# Altium PCB ConnectorBoard.PcbDoc (part 1 of 2)
Units mm, origin at the board's own origin, x right, y up, seen from the top; angles counter-clockwise.
Board outline 139.19 x 208 mm, 4 copper layers (Top Layer, GND, Mid-Layer 1, Bottom Layer); 72 components, 192 nets, 1111 pads, 260 vias.
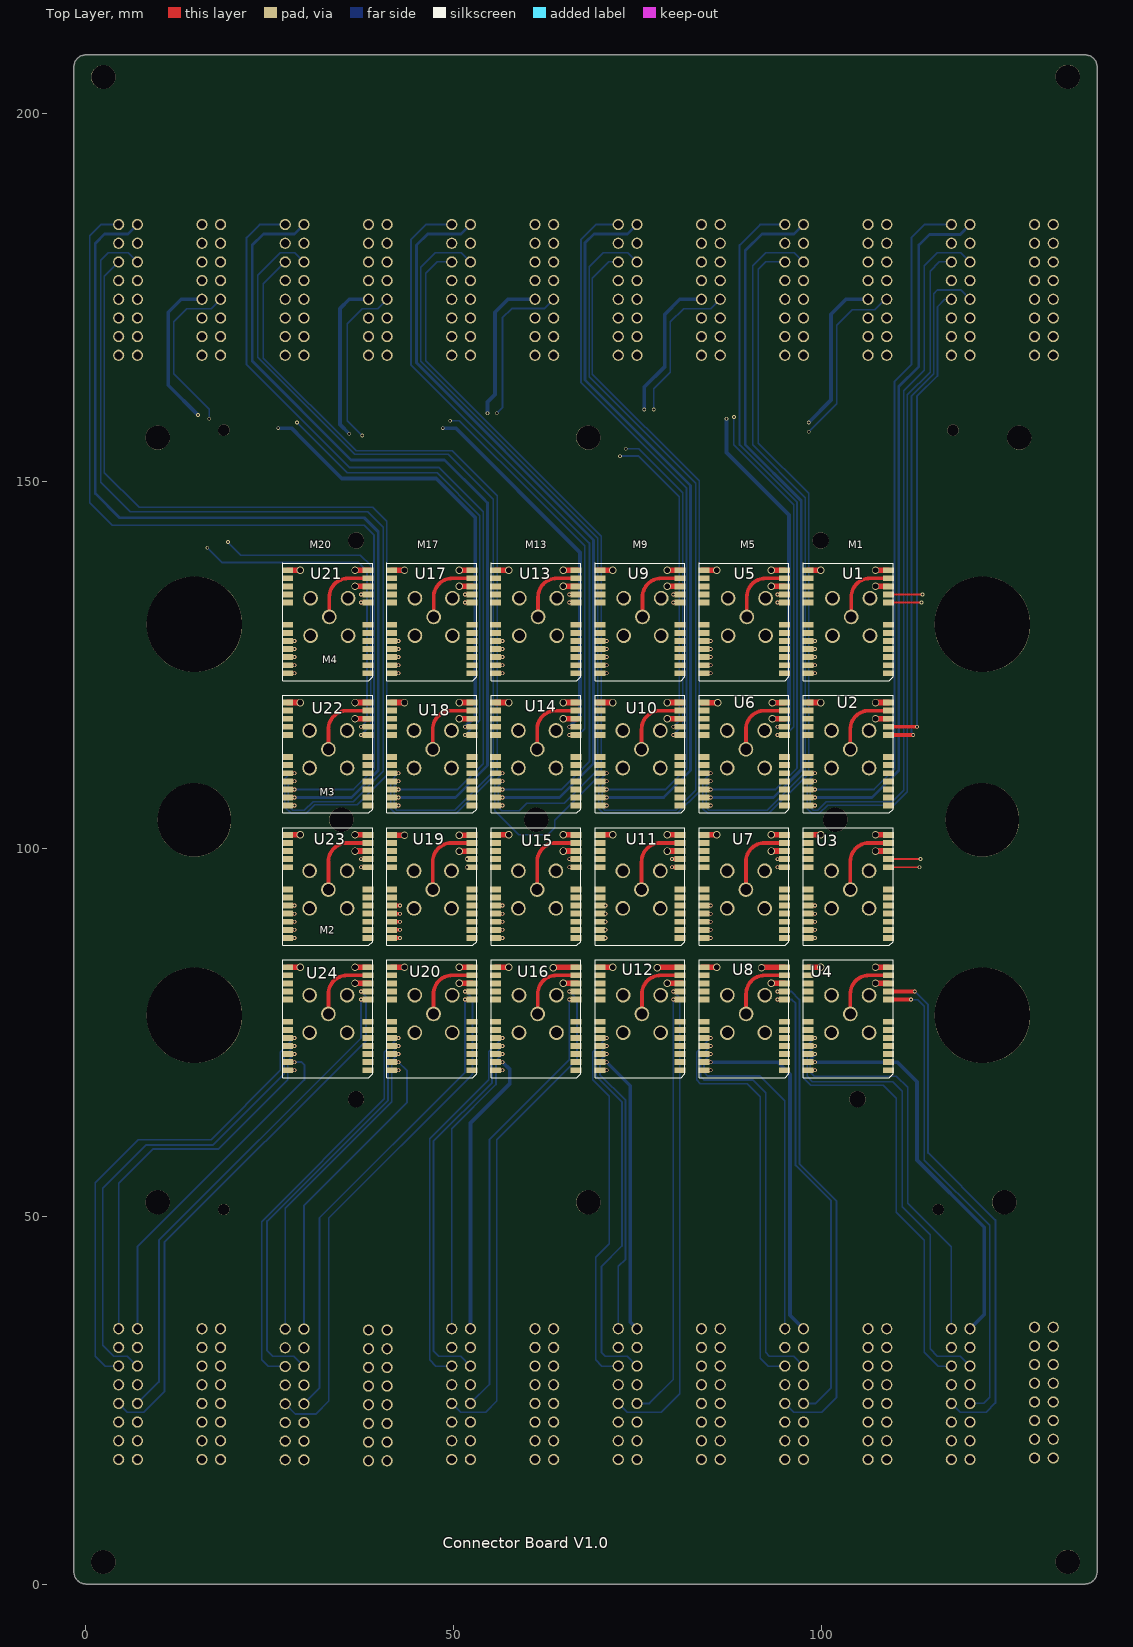
[diagram p0: Top Layer view]
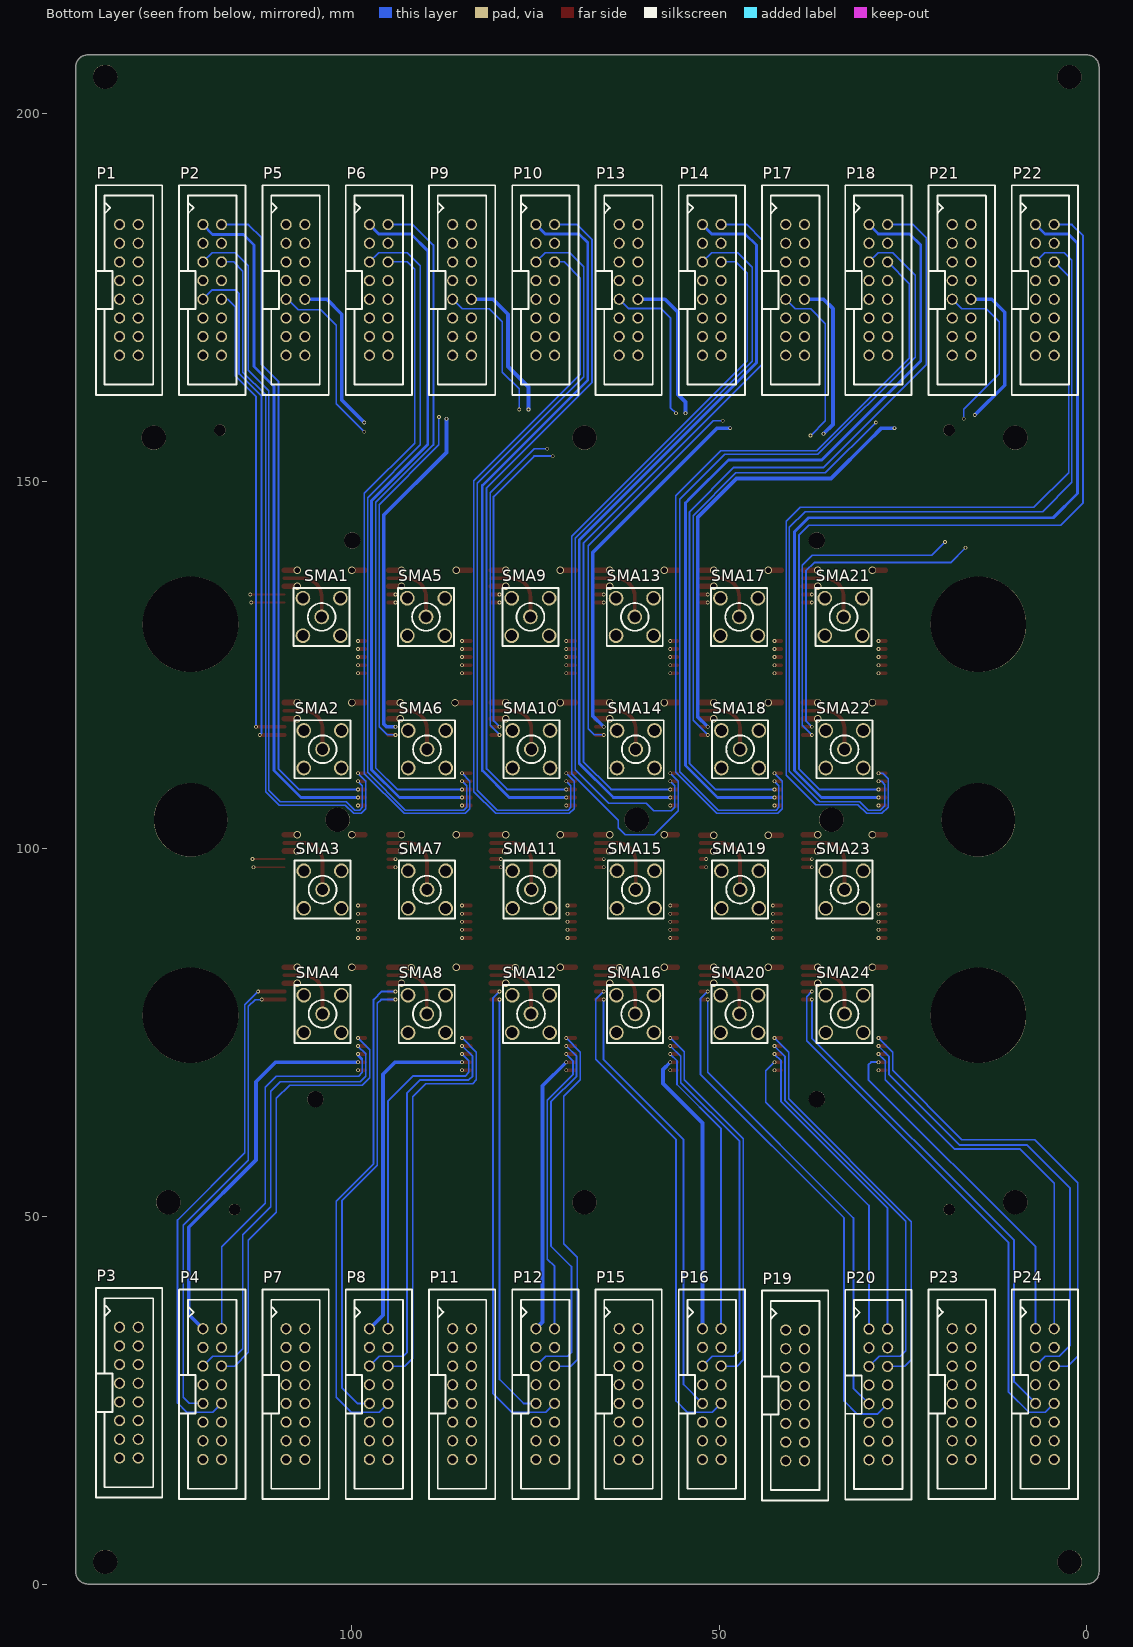
[diagram p1: Bottom Layer view, seen from below]
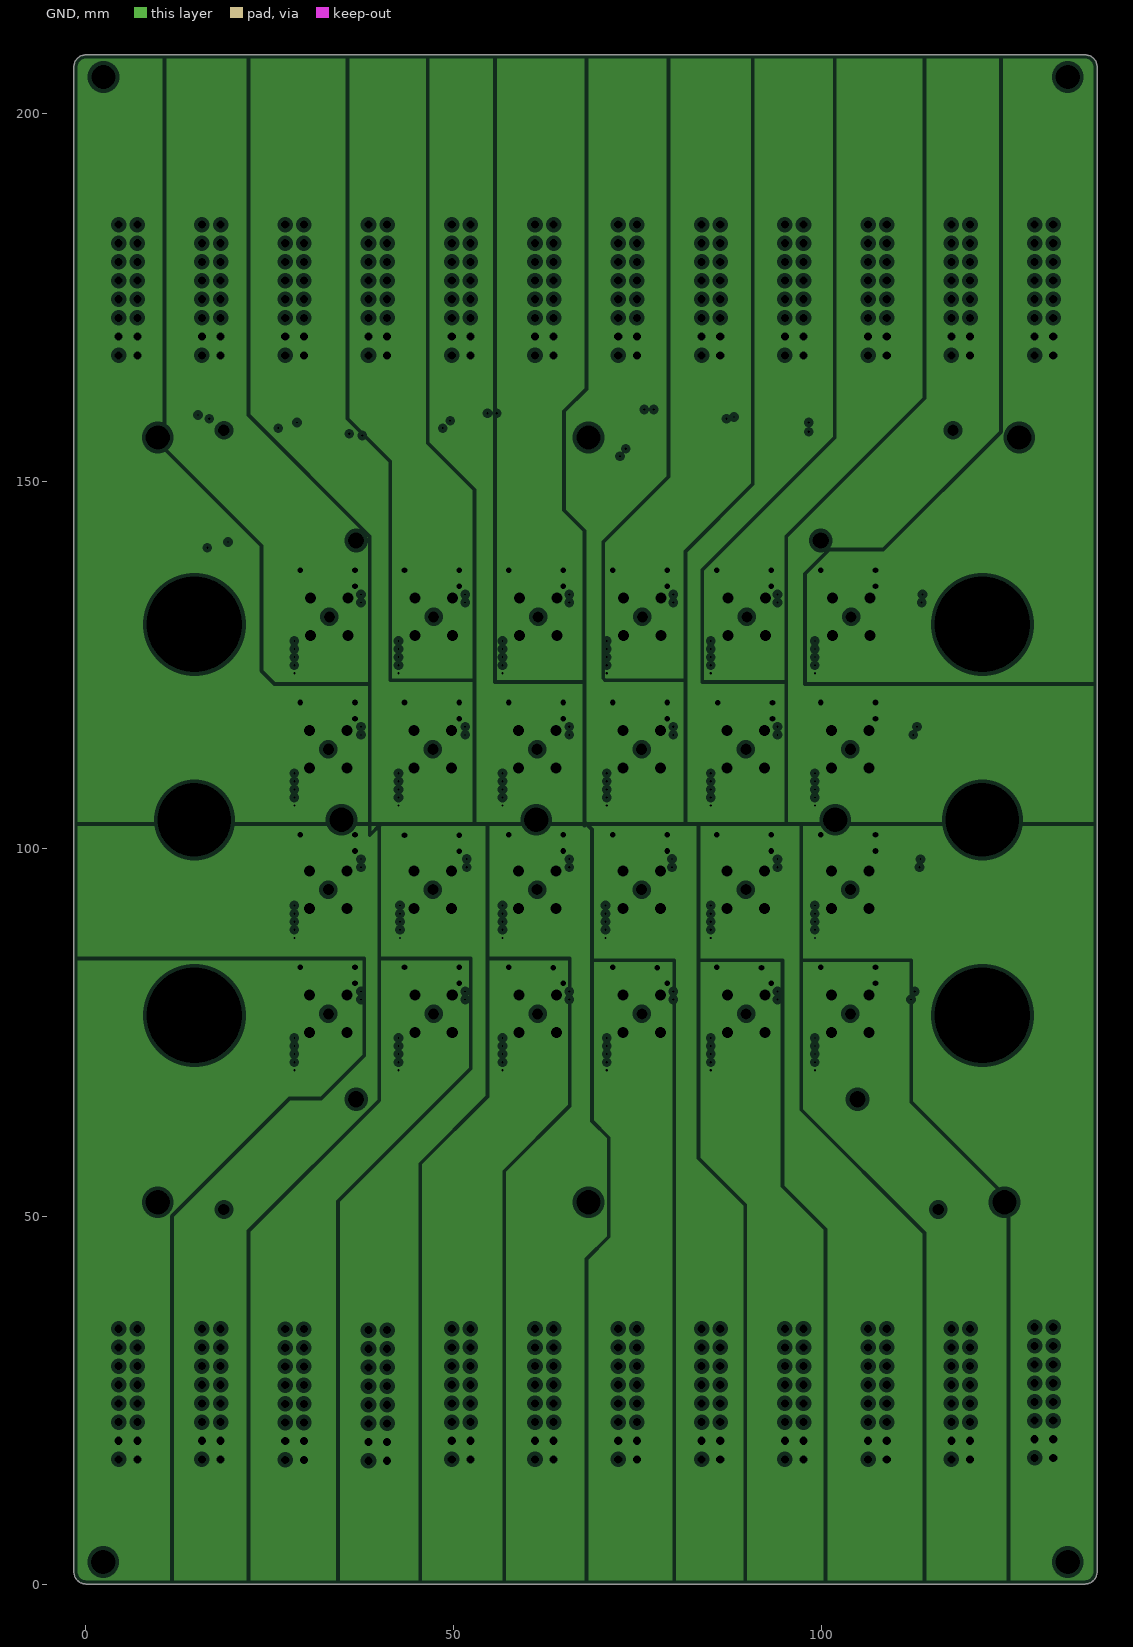
[diagram p2: GND, clearances drawn from the general rule]
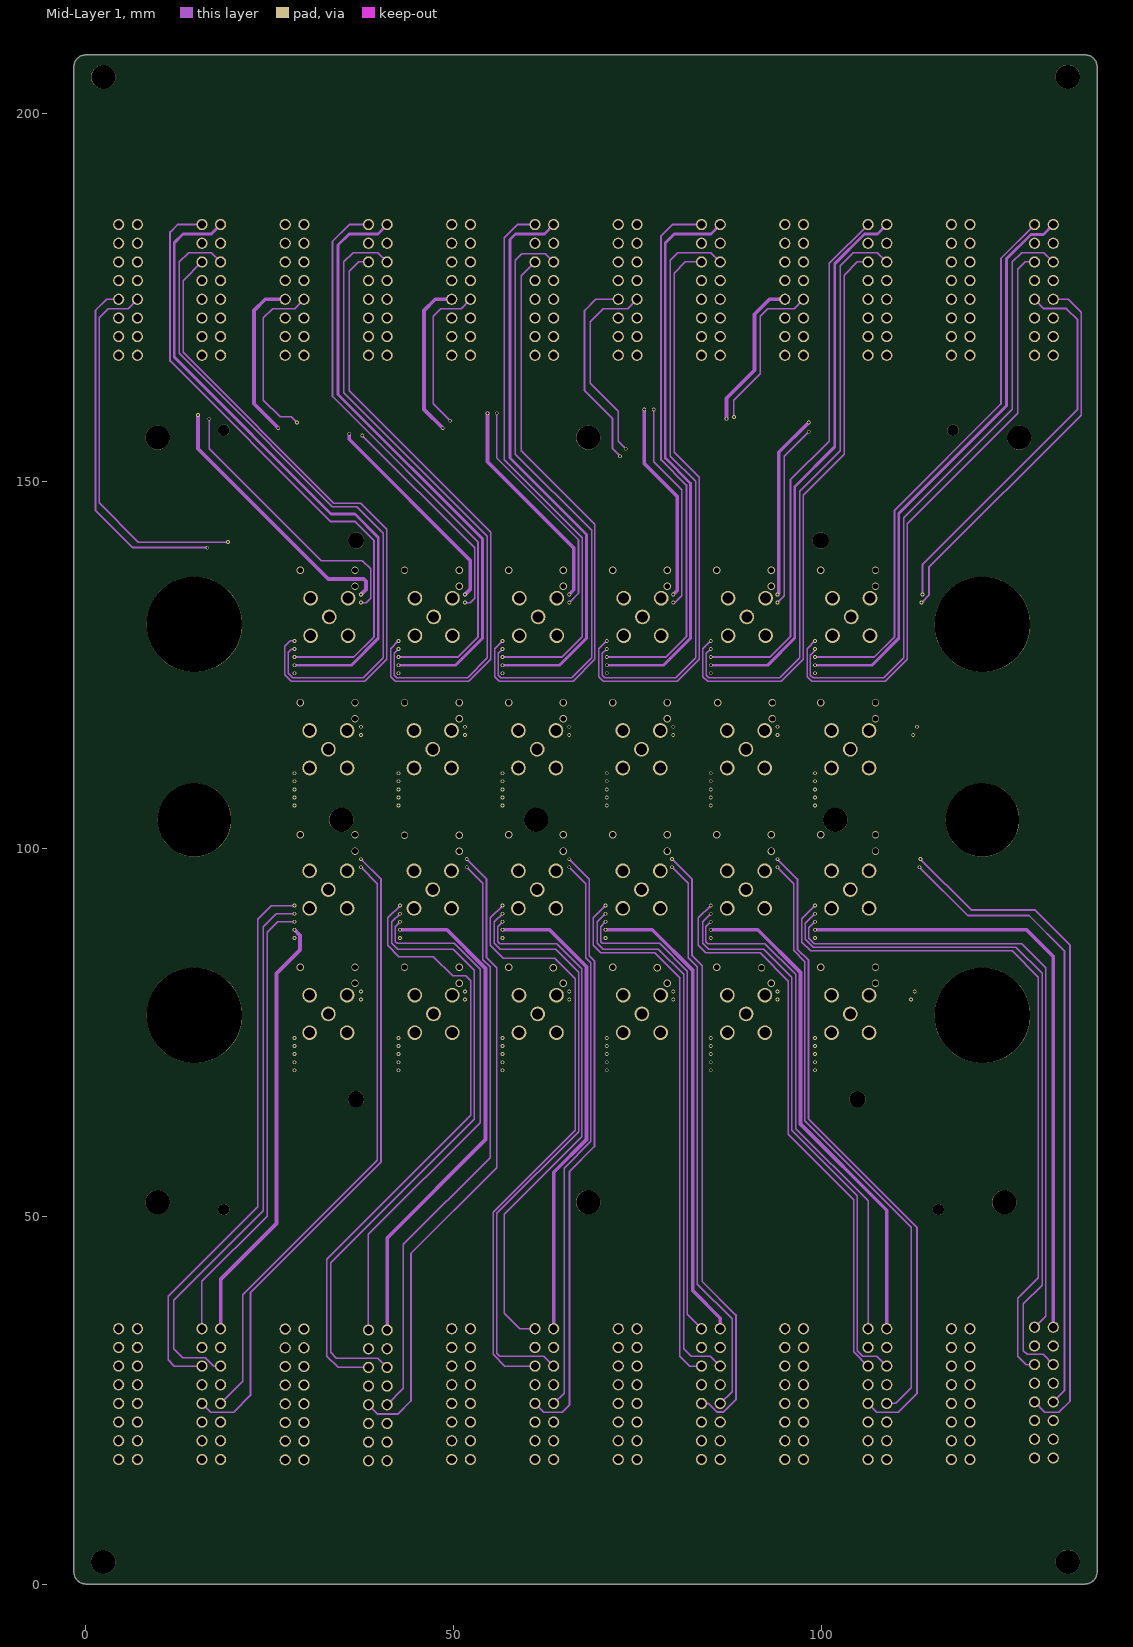
[diagram p3: Mid-Layer 1]

## Layer stack, top to bottom
Top Solder: solder mask 0.0102, Solder Resist, Dk 3.5
Top Layer: signal copper 0.0356
Dielectric1: core 0.32, FR-4, Dk 4.8
GND: plane copper 0.0356
Dielectric3: prepreg 0.32, FR-4, Dk 4.8
Mid-Layer 1: signal copper 0.0356
Dielectric2: core 0.32, FR-4, Dk 4.8
Bottom Layer: signal copper 0.0356
Bottom Solder: solder mask 0.0102, Solder Resist, Dk 3.5

## Board outline
-1.65,1.65 ccw(c0,1.65) 0,0 135.886,0 ccw(c135.886,1.65) 137.536,1.65 137.536,206.35 ccw(c135.886,206.35) 135.886,208 0,208 ccw(c0,206.35) -1.65,206.35

## Design rules (kind name [scope] priority, off if disabled: settings)
Clearance rf [InNetClass('RF')] p1: gap=0.051 ignorepadtopadclearanceinfootprint=FALSE except(0: Arc-Hole Track-Hole SMDPad-Hole THPad-Hole Via-Hole Fill-Hole Poly-Hole Region-Hole Text-Hole)
Clearance [All] p2: gap=0.254 ignorepadtopadclearanceinfootprint=FALSE except(0: Arc-Hole Track-Hole SMDPad-Hole THPad-Hole Via-Hole Fill-Hole Poly-Hole Region-Hole Text-Hole)
MinimumSolderMaskSliver [All] p1: minsoldermaskwidth=0.051
PlaneClearance [All] p1: clearance=0.508
PlaneConnect [All] p1: planeconnectstyle=Relief reliefexpansion=0.508 reliefentries=4 reliefconductorwidth=0.254 reliefairgap=0.254
PolygonConnect [All] p1: connectstyle=Relief reliefconductorwidth=0.254 reliefentries=4 polygonreliefangle="90 Angle" airgapwidth=0.254
RoutingVias [All] p1: holewidth=0.711 width=1.27 viastyle="Through Hole" minholewidth=0.711 minwidth=1.27 maxholewidth=0.711 maxwidth=1.27
SilkToSilkClearance [All] p1: silktosilkclearance=0.127
SilkToSolderMaskClearance SilkscreenOverComponentPads [IsPad] p1: minsilkscreentomaskgap=0 clearancetoexposedcopper=TRUE
SolderMaskExpansion [All] p1: expansion=0.102 istentingtop=FALSE
Width power [InNetClass('POWER')] p1: maxlimit=2.54 minlimit=0.254 preferedwidth=0.381
Width [All] p2: maxlimit=2.54 minlimit=0.203 preferedwidth=0.203
25 further rules are at their usual default settings.

## Components (designator, comment, footprint, x,y, rotation, side; value= is the part's Value field where it differs from the comment)
P1 "KH-2.54PH180-2X8P-L8.9" IDC-TH_16P-P2.54_C3406 130.302,176.022 r270 bottom locked
P2 "KH-2.54PH180-2X8P-L8.9" IDC-TH_16P-P2.54_C3406 118.976,176.022 r270 bottom locked
P3 "KH-2.54PH180-2X8P-L8.9" IDC-TH_16P-P2.54_C3406 130.302,26.035 r270 bottom locked
P4 "KH-2.54PH180-2X8P-L8.9" IDC-TH_16P-P2.54_C3406 118.976,25.832 r270 bottom locked
P5 "KH-2.54PH180-2X8P-L8.9" IDC-TH_16P-P2.54_C3406 107.65,176.022 r270 bottom locked
P6 "KH-2.54PH180-2X8P-L8.9" IDC-TH_16P-P2.54_C3406 96.324,176.022 r270 bottom locked
P7 "KH-2.54PH180-2X8P-L8.9" IDC-TH_16P-P2.54_C3406 107.65,25.832 r270 bottom locked
P8 "KH-2.54PH180-2X8P-L8.9" IDC-TH_16P-P2.54_C3406 96.324,25.832 r270 bottom locked
P9 "KH-2.54PH180-2X8P-L8.9" IDC-TH_16P-P2.54_C3406 84.998,176.022 r270 bottom locked
P10 "KH-2.54PH180-2X8P-L8.9" IDC-TH_16P-P2.54_C3406 73.672,176.022 r270 bottom locked
P11 "KH-2.54PH180-2X8P-L8.9" IDC-TH_16P-P2.54_C3406 84.998,25.832 r270 bottom locked
P12 "KH-2.54PH180-2X8P-L8.9" IDC-TH_16P-P2.54_C3406 73.672,25.832 r270 bottom locked
P13 "KH-2.54PH180-2X8P-L8.9" IDC-TH_16P-P2.54_C3406 62.346,176.022 r270 bottom locked
P14 "KH-2.54PH180-2X8P-L8.9" IDC-TH_16P-P2.54_C3406 51.02,176.022 r270 bottom locked
P15 "KH-2.54PH180-2X8P-L8.9" IDC-TH_16P-P2.54_C3406 62.346,25.832 r270 bottom locked
P16 "KH-2.54PH180-2X8P-L8.9" IDC-TH_16P-P2.54_C3406 51.02,25.832 r270 bottom locked
P17 "KH-2.54PH180-2X8P-L8.9" IDC-TH_16P-P2.54_C3406 39.694,176.022 r270 bottom locked
P18 "KH-2.54PH180-2X8P-L8.9" IDC-TH_16P-P2.54_C3406 28.368,176.022 r270 bottom locked
P19 "KH-2.54PH180-2X8P-L8.9" IDC-TH_16P-P2.54_C3406 39.694,25.654 r270 bottom locked
P20 "KH-2.54PH180-2X8P-L8.9" IDC-TH_16P-P2.54_C3406 28.368,25.781 r270 bottom locked
P21 "KH-2.54PH180-2X8P-L8.9" IDC-TH_16P-P2.54_C3406 17.042,176.022 r270 bottom locked
P22 "KH-2.54PH180-2X8P-L8.9" IDC-TH_16P-P2.54_C3406 5.716,176.022 r270 bottom locked
P23 "KH-2.54PH180-2X8P-L8.9" IDC-TH_16P-P2.54_C3406 17.042,25.832 r270 bottom locked
P24 "KH-2.54PH180-2X8P-L8.9" IDC-TH_16P-P2.54_C3406 5.716,25.832 r270 bottom locked
SMA1 "*" SMA-TH_HL-SMA-KHD4 104.09,131.547 r270 bottom locked
SMA2 "*" SMA-TH_HL-SMA-KHD4 103.963,113.546 r270 bottom locked
SMA3 "*" SMA-TH_HL-SMA-KHD4 103.963,94.454 r90 bottom locked
SMA4 "*" SMA-TH_HL-SMA-KHD4 103.963,77.546 r90 bottom locked
SMA5 "*" SMA-TH_HL-SMA-KHD4 89.892,131.547 r270 bottom locked
SMA6 "*" SMA-TH_HL-SMA-KHD4 89.765,113.546 r270 bottom locked
SMA7 "*" SMA-TH_HL-SMA-KHD4 89.765,94.454 r90 bottom locked
SMA8 "*" SMA-TH_HL-SMA-KHD4 89.79,77.546 r90 bottom locked
SMA9 "*" SMA-TH_HL-SMA-KHD4 75.693,131.547 r270 bottom locked
SMA10 "*" SMA-TH_HL-SMA-KHD4 75.566,113.546 r270 bottom locked
SMA11 "*" SMA-TH_HL-SMA-KHD4 75.566,94.454 r90 bottom locked
SMA12 "*" SMA-TH_HL-SMA-KHD4 75.617,77.546 r90 bottom locked
SMA13 "*" SMA-TH_HL-SMA-KHD4 61.494,131.547 r270 bottom locked
SMA14 "*" SMA-TH_HL-SMA-KHD4 61.367,113.546 r270 bottom locked
SMA15 "*" SMA-TH_HL-SMA-KHD4 61.367,94.454 r90 bottom locked
SMA16 "*" SMA-TH_HL-SMA-KHD4 61.444,77.546 r90 bottom locked
SMA17 "*" SMA-TH_HL-SMA-KHD4 47.296,131.547 r270 bottom locked
SMA18 "*" SMA-TH_HL-SMA-KHD4 47.169,113.546 r270 bottom locked
SMA19 "*" SMA-TH_HL-SMA-KHD4 47.169,94.454 r90 bottom locked
SMA20 "*" SMA-TH_HL-SMA-KHD4 47.27,77.546 r90 bottom locked
SMA21 "*" SMA-TH_HL-SMA-KHD4 33.097,131.547 r270 bottom locked
SMA22 "*" SMA-TH_HL-SMA-KHD4 32.97,113.546 r270 bottom locked
SMA23 "*" SMA-TH_HL-SMA-KHD4 32.97,94.454 r90 bottom locked
SMA24 "*" SMA-TH_HL-SMA-KHD4 32.97,77.546 r90 bottom locked
U1 "LB1020B" LB1020B 109.773,138.882 r180 top locked
U2 "LB1020B" LB1020B 109.773,120.882 r180 top locked
U3 "LB1020B" LB1020B 109.773,102.882 r180 top locked
U4 "LB1020B" LB1020B 109.773,84.882 r180 top locked
U5 "LB1020B" LB1020B 95.613,138.882 r180 top locked
U6 "LB1020B" LB1020B 95.613,120.882 r180 top locked
U7 "LB1020B" LB1020B 95.613,102.882 r180 top locked
U8 "LB1020B" LB1020B 95.613,84.882 r180 top locked
U9 "LB1020B" LB1020B 81.453,138.882 r180 top locked
U10 "LB1020B" LB1020B 81.453,120.882 r180 top locked
U11 "LB1020B" LB1020B 81.453,102.882 r180 top locked
U12 "LB1020B" LB1020B 81.453,84.882 r180 top locked
U13 "LB1020B" LB1020B 67.293,138.882 r180 top locked
U14 "LB1020B" LB1020B 67.293,120.882 r180 top locked
U15 "LB1020B" LB1020B 67.293,102.882 r180 top locked
U16 "LB1020B" LB1020B 67.293,84.882 r180 top locked
U17 "LB1020B" LB1020B 53.133,138.882 r180 top locked
U18 "LB1020B" LB1020B 53.133,120.882 r180 top locked
U19 "LB1020B" LB1020B 53.133,102.882 r180 top locked
U20 "LB1020B" LB1020B 53.133,84.882 r180 top locked
U21 "LB1020B" LB1020B 38.973,138.882 r180 top locked
U22 "LB1020B" LB1020B 38.973,120.882 r180 top locked
U23 "LB1020B" LB1020B 38.973,102.882 r180 top locked
U24 "LB1020B" LB1020B 38.973,84.882 r180 top locked

## Footprints (in the part's own frame and the unit in brackets; to place one, negate y for a bottom-side part, rotate by r counter-clockwise, add the part's x,y. Pads: shape width x height; smd on the part's side, far side on the other; paste and mask are expansions set on the pad)
IDC-TH_16P-P2.54_C3406 [mil]
  round 60 hole 43.3 paste+2: 1(-350,-50) 2(-350,50) 3(-250,-50) 4(-250,50) 5(-150,-50) 6(-150,50) 7(-50,-50) 8(-50,50) 9(50,-50) 10(50,50) 11(150,-50) 12(150,50) 13(250,-50) 14(250,50) 15(350,-50) 16(350,50)
  silkscreen extent -561,-177 563,178
LB1020B [mm]
  rect 1.5x0.8 smd: 1(0.626,15.002) 2(0.626,13.902) 3(0.626,12.802) 4(0.626,11.702) 5(0.626,10.602) 6(0.626,9.502) 7(0.626,8.402) 8(0.626,5.382) 9(0.626,4.282) 10(0.626,3.182) 11(0.626,2.082) 12(0.626,0.982) 13(11.566,0.982) 14(11.566,2.082) 15(11.566,3.182) 16(11.566,4.282) 17(11.566,5.382) 18(11.566,8.402) 19(11.566,9.502) 20(11.566,10.602) 21(11.566,11.702) 22(11.566,12.802) 23(11.566,13.902) 24(11.566,15.002)
  silkscreen extent 0,0 12.2,16
SMA-TH_HL-SMA-KHD4 [mm]
  round 2 hole 1.5 paste+0.051: 1(-2.55,2.55) 2(2.55,2.55) 3(2.55,-2.55) 4(-2.55,-2.55) 5(0,0)
  silkscreen extent -3.94,-3.81 3.94,3.81

## Part data
P1 P2 P3 P4 P5 P6 P7 P8 P9 P10 P11 P12 P13 P14 P15 P16 P17 P18 P19 P20 P21 P22 P23 P24: library part HDR-IDC-2.54-2X8P
SMA1 SMA2 SMA3 SMA4 SMA5 SMA6 SMA7 SMA8 SMA9 SMA10 SMA11 SMA12 SMA13 SMA14 SMA15 SMA16 SMA17 SMA18 SMA19 SMA20 SMA21 SMA22 SMA23 SMA24: library part HL-SMA-KHD4

## Free pads (board coordinates)
  round 3.3 hole 3.3: 1(2.35,2.994) 1(2.367,204.988) 1(9.748,51.944) 1(9.748,155.944) 1(34.748,103.944) 1(61.238,103.944) 1(68.338,51.944) 1(68.338,155.944) 1(101.928,103.944) 1(124.928,51.944) 1(126.928,155.944) 1(133.536,3) 1(133.536,205)
  round 0.152 on Mech1: 1(10.957,16.172) 1(135.886,208) 1(137.536,206.35)
  round 13 hole 13: 1(14.748,77.353) 1(14.748,130.536) 1(121.928,130.536)
  round 10 hole 10: 1(14.748,103.944) 1(121.928,103.944)
  round 1.55 hole 1.55: 1(18.748,50.944) 1(18.748,156.944) 1(115.928,50.944) 1(117.928,156.944)
  round 2.2 hole 2.2: 1(36.738,65.944) 1(36.738,141.944) 1(99.938,141.944) 1(104.938,65.944)
  round 13.002 hole 13.002: 1(121.928,77.353)
  round 0.064 on Mech6: 1(131.596,50.948)

## Via types
v1: diameter 0.508, hole 0.305, Top Layer to Bottom Layer, tented both sides, 188 vias
v2: diameter 1.016, hole 0.762, Top Layer to Bottom Layer, tented both sides, 72 vias

## Nets (pads, with @x,y where several pads share a name; then routed paths per layer and width w, separated by ;. In a path a pad name is that pad's centre, name@x,y a point inside that pad or via, vN(x,y) a via of type N, cw(c..) or ccw(c..) an arc to the next point about the centre after c; other vN are vias at no path point)
"DCIN_3.3V _RF1": P1.1 U1.23 | length 79.8
  Top Layer w0.508: U1.23@98.207,124.98 v1(99.146,124.98)
  Mid-Layer 1 w0.381: v1(99.146,124.98) 106.896,124.98 110.553,128.637 110.553,145.606 125.222,160.274 125.222,180.268 128.532,183.578 130.238,183.578 P1.1@131.572,184.912
"DCIN_3.3V _RF2": P2.1 U2.23 | length 94.6
  Top Layer w0.508: U2.23@98.207,106.98 v1(99.146,106.98)
  Bottom Layer w0.381: v1(99.146,106.98) 106.896,106.98 110.553,110.637 110.553,162.877 113.284,165.608 113.284,182.118 114.744,183.578 118.912,183.578 P2.1@120.246,184.912
"DCIN_3.3V _RF3": P3.1 U3.23 | length 85.3
  Top Layer w0.508: U3.23@98.207,88.98 v1(99.146,88.98)
  Mid-Layer 1 w0.508: v1(99.146,88.98) 127.936,88.98 131.572,85.344 P3.1@131.572,34.925
"DCIN_3.3V _RF4": P4.1 U4.23 | length 54.1
  Top Layer w0.508: U4.23@98.207,70.98 v1(99.146,70.98)
  Bottom Layer w0.508: v1(99.146,70.98) 110.376,70.98 113.03,68.326 113.03,57.658 122.174,48.514 122.174,36.65 P4.1@120.246,34.722
"DCIN_3.3V _RF5": P5.1 U5.23 | length 76.6
  Top Layer w0.508: U5.23@83.82,124.98 v1(84.986,124.98)
  Mid-Layer 1 w0.381: v1(84.986,124.98) 92.736,124.98 96.394,128.637 96.394,149.226 101.854,154.686 101.854,179.578 105.918,183.642 107.65,183.642 P5.1@108.92,184.912
"DCIN_3.3V _RF6": P6.1 U6.23 | length 98.2
  Top Layer w0.508: U6.23@83.82,106.98 v1(84.986,106.98)
  Bottom Layer w0.381: v1(84.986,106.98) 93.518,106.98 97.295,110.757 97.295,147.354 89.662,154.986 89.662,181.356 91.948,183.642 96.324,183.642 P6.1@97.594,184.912
"DCIN_3.3V _RF7": P7.1 U7.23 | length 69.1
  Top Layer w0.508: U7.23@83.82,88.98 v1(84.986,88.98)
  Mid-Layer 1 w0.508: v1(84.986,88.98) 91.36,88.98 97.18,83.16 97.18,62.586 108.92,50.846 P7.1@108.92,34.722
"DCIN_3.3V _RF8": P8.1 U8.23 | length 48
  Top Layer w0.508: U8.23@83.82,70.98 v1(84.986,70.98)
  Bottom Layer w0.508: v1(84.986,70.98) 94.12,70.98 95.758,69.342 95.758,55.88 95.758,36.558 P8.1@97.594,34.722
"DCIN_3.3V _RF9": P9.1 U9.23 | length 77.9
  Top Layer w0.508: U9.23@69.596,124.98 v1(70.826,124.98)
  Mid-Layer 1 w0.381: v1(70.826,124.98) 78.576,124.98 82.234,128.637 82.234,149.715 78.803,153.145 78.803,182.435 80.01,183.642 84.998,183.642 P9.1@86.268,184.912
"DCIN_3.3V _RF10": P10.1 U10.23 | length 100
  Top Layer w0.508: U10.23@69.596,106.98 v1(70.826,106.98)
  Bottom Layer w0.381: v1(70.826,106.98) 78.576,106.98 82.234,110.637 82.234,149.414 67.882,163.766 67.882,182.435 69.088,183.642 73.672,183.642 P10.1@74.942,184.912
"DCIN_3.3V _RF11": P11.1 U11.23 | length 65.5
  Top Layer w0.508: U11.23@69.596,88.984 v1(70.653,88.984)
  Mid-Layer 1 w0.508: v1(70.653,88.984) 77.028,88.984 82.55,83.462 82.55,39.878 86.268,36.16 P11.1@86.268,34.722
"DCIN_3.3V _RF12": P12.1 U12.23 | length 39.2
  Top Layer w0.508: U12.23@69.596,70.98 v1(70.826,70.98)
  Bottom Layer w0.508: v1(70.826,70.98) 74.041,67.764 74.041,35.623 P12.1@74.942,34.722
"DCIN_3.3V _RF13": P13.1 U13.23 | length 79.2
  Top Layer w0.508: U13.23@55.727,124.98 v1(56.666,124.98)
  Mid-Layer 1 w0.381: v1(56.666,124.98) 64.416,124.98 68.074,128.637 68.074,142.746 57.658,153.162 57.658,182.88 58.42,183.642 62.346,183.642 P13.1@63.616,184.912
"DCIN_3.3V _RF14": P14.1 U14.23 | length 104.2
  Top Layer w0.508: U14.23@55.727,106.98 v1(56.666,106.98)
  Bottom Layer w0.381: P14.1@52.29,184.912 51.02,183.642 46.482,183.642 44.958,182.118 44.958,166.116 69.05,142.024 69.05,111.613 64.416,106.98 v1(56.666,106.98)
"DCIN_3.3V _RF15": P15.1 U15.23 | length 65.5
  Top Layer w0.508: U15.23@55.727,88.98 v1(56.666,88.98)
  Mid-Layer 1 w0.508: v1(56.666,88.98) 63.04,88.98 68.072,83.948 68.072,60.452 63.616,55.996 P15.1@63.616,34.722
"DCIN_3.3V _RF16": P16.1 U16.23 | length 39.8
  Top Layer w0.508: U16.23@55.727,70.98 v1(56.666,70.98)
  Bottom Layer w0.508: P16.1@52.29,34.722 52.29,62.704 57.658,68.072 57.658,69.987 v1(56.666,70.98)
"DCIN_3.3V _RF17": P17.1 U17.23 | length 83.3
  Top Layer w0.508: U17.23@41.567,124.98 v1(42.506,124.98)
  Mid-Layer 1 w0.381: P17.1@40.964,184.912 39.694,183.642 35.814,183.642 34.29,182.118 34.29,161.798 53.914,142.174 53.914,128.637 50.256,124.98 v1(42.506,124.98)
"DCIN_3.3V _RF18": P18.1 U18.23 | length 114.5
  Top Layer w0.508: U18.23@41.567,106.98 v1(42.506,106.98)
  Bottom Layer w0.381: P18.1@29.638,184.912 28.368,183.642 24.13,183.642 22.606,182.118 22.606,166.37 36.068,152.908 48.768,152.908 53.914,147.762 54.61,147.066 54.61,111.333 50.256,106.98 v1(42.506,106.98)
"DCIN_3.3V _RF19": P19.1 U19.23 | length 69.7
  Top Layer w0.508: U19.23@41.567,88.984 v1(42.713,88.984)
  Mid-Layer 1 w0.508: P19.1@40.964,34.544 40.964,47.06 54.356,60.452 54.356,83.716 49.088,88.984 v1(42.713,88.984)
"DCIN_3.3V _RF20": P20.1 U20.23 | length 43.6
  Top Layer w0.508: U20.23@41.567,70.98 v1(42.506,70.98)
  Bottom Layer w0.254: P20.1@29.638,34.671 29.638,51.482 43.688,65.532 43.688,69.797 v1(42.506,70.98)
"DCIN_3.3V _RF21": P21.1 U21.23 | length 88.4
  Top Layer w0.508: U21.23@27.407,124.98 v1(28.346,124.98)
  Mid-Layer 1 w0.381: P21.1@18.312,184.912 17.042,183.642 13.208,183.642 12.002,182.435 12.002,166.878 33.337,145.542 36.576,145.542 39.754,142.364 39.754,128.637 36.096,124.98 v1(28.346,124.98)
"DCIN_3.3V _RF22": P22.1 U22.23 | length 128.8
  Top Layer w0.508: U22.23@27.407,106.98 v1(28.346,106.98)
  Bottom Layer w0.381: P22.1@6.986,184.912 5.716,183.642 2.54,183.642 1.27,182.372 1.27,148.336 4.572,145.034 34.544,145.034 34.798,145.034 ; v1(28.346,106.98) 36.096,106.98 39.754,110.637 39.754,143.126 37.846,145.034 34.798,145.034 ; 35.814,145.034 34.798,145.034
"DCIN_3.3V _RF23": P23.1 U23.23 | length 60
  Top Layer w0.508: U23.23@27.407,88.98 v1(28.346,88.98)
  Mid-Layer 1 w0.508: P23.1@18.312,34.722 18.312,41.426 25.908,49.022 25.908,83.058 29.108,86.258 29.108,88.218 v1(28.346,88.98)
"DCIN_3.3V _RF24": P24.1 U24.23 | length 47.8
  Top Layer w0.508: U24.23@27.407,70.98 v1(28.346,70.98)
  Bottom Layer w0.254: P24.1@6.986,34.722 6.986,45.848 29.718,68.58 29.718,70.612 29.35,70.98 v1(28.346,70.98)
GND_RF1: P1.13 P1.14 P1.15 SMA1.1 SMA1.2 SMA1.3 SMA1.4 U1.10 U1.12 U1.13 U1.24 | length 6.2
  Top Layer w0.508: U1.24@98.207,123.88 v1(99.146,123.88)
  Top Layer w0.762: U1.13@98.207,137.9 v2(99.964,137.9) ; v2(107.389,135.7) U1.10@109.147,135.7 ; v2(107.389,137.9) U1.12@109.147,137.9
GND_RF2: P2.13 P2.14 P2.15 SMA2.1 SMA2.2 SMA2.3 SMA2.4 U2.10 U2.12 U2.13 U2.24 | length 6.2
  Top Layer w0.508: U2.24@98.207,105.88 v1(99.146,105.88)
  Top Layer w0.762: U2.13@98.207,119.9 v2(99.964,119.9) ; v2(107.389,117.7) U2.10@109.147,117.7 ; v2(107.389,119.9) U2.12@109.147,119.9
GND_RF3: P3.13 P3.14 P3.15 SMA3.1 SMA3.2 SMA3.3 SMA3.4 U3.10 U3.12 U3.13 U3.24 | length 6.2
  Top Layer w0.508: U3.24@98.207,87.88 v1(99.146,87.88)
  Top Layer w0.762: U3.13@98.207,101.9 v2(99.964,101.9) ; v2(107.389,99.7) U3.10@109.147,99.7 ; v2(107.389,101.9) U3.12@109.147,101.9
GND_RF4: P4.13 P4.14 P4.15 SMA4.1 SMA4.2 SMA4.3 SMA4.4 U4.10 U4.12 U4.13 U4.24 | length 6.2
  Top Layer w0.508: U4.24@98.207,69.88 v1(99.146,69.88)
  Top Layer w0.762: U4.13@98.207,83.9 v2(99.964,83.9) ; v2(107.389,81.7) U4.10@109.147,81.7 ; v2(107.389,83.9) U4.12@109.147,83.9
GND_RF5: P5.13 P5.14 P5.15 SMA5.1 SMA5.2 SMA5.3 SMA5.4 U5.10 U5.12 U5.13 U5.24 | length 6.7
  Top Layer w0.508: U5.24@83.82,123.88 v1(84.986,123.88)
  Top Layer w0.762: U5.13@83.82,137.9 v2(85.804,137.9) ; v2(93.229,135.7) U5.10@94.987,135.7 ; v2(93.229,137.9) U5.12@94.987,137.9
GND_RF6: P6.13 P6.14 P6.15 SMA6.1 SMA6.2 SMA6.3 SMA6.4 U6.10 U6.12 U6.13 U6.24 | length 6.5
  Top Layer w0.508: U6.24@83.82,105.88 v1(84.986,105.88)
  Top Layer w0.762: U6.13@83.82,119.888 v2(85.95,119.888) ; v2(93.374,117.688) U6.10@94.987,117.688 ; v2(93.374,119.888) U6.12@94.987,119.888
GND_RF7: P7.13 P7.14 P7.15 SMA7.1 SMA7.2 SMA7.3 SMA7.4 U7.10 U7.12 U7.13 U7.24 | length 6.7
  Top Layer w0.508: U7.24@83.82,87.88 v1(84.986,87.88)
  Top Layer w0.762: U7.13@83.82,101.9 v2(85.804,101.9) ; v2(93.229,99.7) U7.10@94.987,99.7 ; v2(93.229,101.9) U7.12@94.987,101.9
GND_RF8: P8.13 P8.14 P8.15 SMA8.1 SMA8.2 SMA8.3 SMA8.4 U8.10 U8.12 U8.13 U8.24 | length 7.9
  Top Layer w0.508: U8.24@83.82,69.88 v1(84.986,69.88)
  Top Layer w0.762: U8.13@83.82,83.9 v2(85.804,83.9) ; v2@91.964,83.9 U8.12@94.987,83.9 ; v2(93.229,81.7) U8.10@94.987,81.7
  other v2: 91.884,83.82
GND_RF9: P9.13 P9.14 P9.15 SMA9.1 SMA9.2 SMA9.3 SMA9.4 U9.10 U9.12 U9.13 U9.24 | length 7.2
  Top Layer w0.508: U9.24@69.596,123.88 v1(70.826,123.88)
  Top Layer w0.762: U9.13@69.596,137.9 v2(71.644,137.9) ; v2(79.069,135.7) U9.10@81.026,135.7 ; v2(79.069,137.9) U9.12@81.026,137.9
GND_RF10: P10.13 P10.14 P10.15 SMA10.1 SMA10.2 SMA10.3 SMA10.4 U10.10 U10.12 U10.13 U10.24 | length 7.2
  Top Layer w0.508: U10.24@69.596,105.88 v1(70.826,105.88)
  Top Layer w0.762: U10.13@69.596,119.9 v2(71.644,119.9) ; v2(79.069,117.7) U10.10@81.026,117.7 ; v2(79.069,119.9) U10.12@81.026,119.9
GND_RF11: P11.13 P11.14 P11.15 SMA11.1 SMA11.2 SMA11.3 SMA11.4 U11.10 U11.12 U11.13 U11.24 | length 7
  Top Layer w0.508: U11.24@69.596,87.884 v1(70.653,87.884)
  Top Layer w0.762: U11.13@69.596,101.9 v2(71.644,101.9) ; v2(79.069,99.7) U11.10@81.026,99.7 ; v2(79.069,101.9) U11.12@81.026,101.9
GND_RF12: P12.13 P12.14 P12.15 SMA12.1 SMA12.2 SMA12.3 SMA12.4 U12.10 U12.12 U12.13 U12.24 | length 8.5
  Top Layer w0.508: U12.24@69.596,69.88 v1(70.826,69.88)
  Top Layer w0.762: U12.13@69.596,83.9 v2(71.644,83.9) ; v2@77.804,83.9 U12.12@81.026,83.9 ; v2(79.069,81.7) U12.10@81.026,81.7
  other v2: 77.724,83.82
GND_RF13: P13.13 P13.14 P13.15 SMA13.1 SMA13.2 SMA13.3 SMA13.4 U13.10 U13.12 U13.13 U13.24 | length 6.5
  Top Layer w0.508: U13.24@55.727,123.88 v1(56.666,123.88)
  Top Layer w0.762: U13.13@55.727,137.9 v2(57.484,137.9) ; v2(64.909,135.7) U13.10@66.802,135.7 ; v2(64.909,137.9) U13.12@66.802,137.9
GND_RF14: P14.13 P14.14 P14.15 SMA14.1 SMA14.2 SMA14.3 SMA14.4 U14.10 U14.12 U14.13 U14.24 | length 6.5
  Top Layer w0.508: U14.24@55.727,105.88 v1(56.666,105.88)
  Top Layer w0.762: U14.13@55.727,119.9 v2(57.484,119.9) ; v2(64.909,117.7) U14.10@66.802,117.7 ; v2(64.909,119.9) U14.12@66.802,119.9
GND_RF15: P15.13 P15.14 P15.15 SMA15.1 SMA15.2 SMA15.3 SMA15.4 U15.10 U15.12 U15.13 U15.24 | length 6.5
  Top Layer w0.508: U15.24@55.727,87.88 v1(56.666,87.88)
  Top Layer w0.762: U15.13@55.727,101.9 v2(57.484,101.9) ; v2(64.909,99.7) U15.10@66.802,99.7 ; v2(64.909,101.9) U15.12@66.802,101.9
GND_RF16: P16.13 P16.14 P16.15 SMA16.1 SMA16.2 SMA16.3 SMA16.4 U16.10 U16.12 U16.13 U16.24 | length 7.7
  Top Layer w0.508: U16.24@55.727,69.88 v1(56.666,69.88)
  Top Layer w0.762: U16.13@55.727,83.9 v2(57.484,83.9) ; v2@63.644,83.9 U16.12@66.802,83.9 ; v2(64.909,81.7) U16.10@66.802,81.7
  other v2: 63.564,83.82
GND_RF17: P17.13 P17.14 P17.15 SMA17.1 SMA17.2 SMA17.3 SMA17.4 U17.10 U17.12 U17.13 U17.24 | length 6.2
  Top Layer w0.508: U17.24@41.567,123.88 v1(42.506,123.88)
  Top Layer w0.762: U17.13@41.567,137.9 v2(43.324,137.9) ; v2(50.749,135.7) U17.10@52.507,135.7 ; v2(50.749,137.9) U17.12@52.507,137.9
GND_RF18: P18.13 P18.14 P18.15 SMA18.1 SMA18.2 SMA18.3 SMA18.4 U18.10 U18.12 U18.13 U18.24 | length 6.2
  Top Layer w0.508: U18.24@41.567,105.88 v1(42.506,105.88)
  Top Layer w0.762: U18.13@41.567,119.9 v2(43.324,119.9) ; v2(50.749,117.7) U18.10@52.507,117.7 ; v2(50.749,119.9) U18.12@52.507,119.9
GND_RF19: P19.13 P19.14 P19.15 SMA19.1 SMA19.2 SMA19.3 SMA19.4 U19.10 U19.12 U19.13 U19.24 | length 6.4
  Top Layer w0.508: U19.24@41.567,87.884 v1(42.713,87.884)
  Top Layer w0.762: U19.13@41.567,101.854 v2(43.324,101.854) ; v2(50.749,99.654) U19.10@52.507,99.654 ; v2(50.749,101.854) U19.12@52.507,101.854
GND_RF20: P20.13 P20.14 P20.15 SMA20.1 SMA20.2 SMA20.3 SMA20.4 U20.10 U20.12 U20.13 U20.24 | length 6.2
  Top Layer w0.508: U20.24@41.567,69.88 v1(42.506,69.88)
  Top Layer w0.762: U20.13@41.567,83.9 v2(43.324,83.9) ; v2(50.749,81.7) U20.10@52.507,81.7 ; v2(50.749,83.9) U20.12@52.507,83.9
GND_RF21: P21.13 P21.14 P21.15 SMA21.1 SMA21.2 SMA21.3 SMA21.4 U21.10 U21.12 U21.13 U21.24 | length 6.7
  Top Layer w0.508: U21.24@27.407,123.88 v1(28.346,123.88)
  Top Layer w0.762: U21.13@27.407,137.9 v2(29.164,137.9) ; v2(36.589,135.7) U21.10@38.608,135.7 ; v2(36.589,137.9) U21.12@38.608,137.9
GND_RF22: P22.13 P22.14 P22.15 SMA22.1 SMA22.2 SMA22.3 SMA22.4 U22.10 U22.12 U22.13 U22.24 | length 6.7
  Top Layer w0.508: U22.24@27.407,105.88 v1(28.346,105.88)
  Top Layer w0.762: U22.13@27.407,119.9 v2(29.164,119.9) ; v2(36.589,117.7) U22.10@38.608,117.7 ; v2(36.589,119.9) U22.12@38.608,119.9
GND_RF23: P23.13 P23.14 P23.15 SMA23.1 SMA23.2 SMA23.3 SMA23.4 U23.10 U23.12 U23.13 U23.24 | length 6.7
  Top Layer w0.508: U23.24@27.407,87.88 v1(28.346,87.88)
  Top Layer w0.762: U23.13@27.407,101.9 v2(29.164,101.9) ; v2(36.589,99.7) U23.10@38.608,99.7 ; v2(36.589,101.9) U23.12@38.608,101.9
GND_RF24: P24.13 P24.14 P24.15 SMA24.1 SMA24.2 SMA24.3 SMA24.4 U24.10 U24.12 U24.13 U24.24 | length 6.7
  Top Layer w0.508: U24.24@27.407,69.88 v1(28.346,69.88)
  Top Layer w0.762: U24.13@27.407,83.9 v2(29.164,83.9) ; v2(36.589,81.7) U24.10@38.608,81.7 ; v2(36.589,83.9) U24.12@38.608,83.9
RESET_RF1: P1.9 U1.8 | length 57.5
  Top Layer w0.254: U1.8@109.147,133.5 v1(113.662,133.5)
  Mid-Layer 1 w0.254: v1(113.662,133.5) 114.656,134.493 114.656,138.278 135.382,159.004 135.382,172.974 133.604,174.752 P1.9@131.572,174.752
RESET_RF2: P2.9 U2.8 | length 70.4
  Top Layer w0.508: U2.8@109.147,115.5 v1(112.522,115.5)
  Bottom Layer w0.254: v1(112.522,115.5) 112.268,115.754 112.268,161.544 115.316,164.592 115.316,175.514 115.824,176.022 118.976,176.022 P2.9@120.246,174.752
RESET_RF3: P3.9 U3.8 | length 90.6
  Top Layer w0.254: U3.8@109.147,97.502 v1(113.364,97.502)
  Mid-Layer 1 w0.254: v1(113.364,97.502) 119.934,90.932 128.27,90.932 133.096,86.106 133.096,26.289 P3.9@131.572,24.765
RESET_RF4: P4.9 U4.8 | length 65.2
  Top Layer w0.508: U4.8@109.147,79.502 v1(112.223,79.502)
  Bottom Layer w0.203: v1(112.223,79.502) 113.149,79.502 114.046,78.605 114.046,57.658 122.936,48.768 122.936,25.4 122.098,24.562 P4.9@120.246,24.562
RESET_RF5: P5.9 U5.8 | length 50.3
  Top Layer w0.508: v1(94.047,133.5) U5.8@94.987,133.5
  Mid-Layer 1 w0.203: v1(94.047,133.5) 94.996,134.448 94.996,153.416 v1(98.298,156.718)
  Bottom Layer w0.203: v1(98.298,156.718) 102.108,160.528 102.108,171.196 104.241,173.329 107.289,173.329 108.712,174.752 P5.9@108.92,174.752
RESET_RF6: P6.9 U6.8 | length 71.1
  Top Layer w0.508: v1(94.047,115.5) U6.8@94.987,115.5
  Mid-Layer 1 w0.203: v1(88.138,158.75) 88.138,161.036 91.694,164.592 91.694,172.466 92.71,173.482 96.324,173.482 P6.9@97.594,174.752
  Bottom Layer w0.203: v1(88.138,158.75) 88.138,154.94 96.241,146.837 96.241,116.586 95.154,115.5 v1(94.047,115.5)
RESET_RF7: P7.9 U7.8 | length 83.5
  Top Layer w0.508: v1(94.047,97.5) U7.8@94.987,97.5
  Mid-Layer 1 w0.203: v1(94.047,97.5) 96.266,95.281 96.266,86.186 97.79,84.662 97.79,62.992 112.268,48.514 112.268,26.67 110.16,24.562 P7.9@108.92,24.562
RESET_RF8: P8.9 U8.8 | length 62.6
  Top Layer w0.508: v1(94.047,79.5) U8.8@94.987,79.5
  Bottom Layer w0.254: v1(94.047,79.5) 96.014,79.5 96.52,78.994 96.52,56.94 101.346,52.114 101.346,26.67 99.238,24.562 P8.9@97.594,24.562
RESET_RF9: P9.9 U9.8 | length 50.5
  Top Layer w0.508: v1(79.887,133.5) U9.8@81.026,133.5
  Mid-Layer 1 w0.203: v1(77.216,159.766) 77.216,152.654 81.026,148.844 81.026,134.446 80.079,133.5 v1(79.887,133.5)
  Bottom Layer w0.203: v1(77.216,159.766) 77.216,162.56 79.502,164.846 79.502,171.704 81.28,173.482 84.998,173.482 P9.9@86.268,174.752
RESET_RF10: P10.9 U10.8 | length 71.8
  Top Layer w0.508: v1(79.887,115.5) U10.8@81.026,115.5
  Mid-Layer 1 w0.203: v1(73.406,154.432) 72.39,155.448 72.39,159.512 68.58,163.322 68.58,171.704 70.358,173.482 73.672,173.482 P10.9@74.942,174.752
  Bottom Layer w0.203: v1(73.406,154.432) 75.184,154.432 81.179,148.437 81.179,116.792 v1(79.887,115.5)
RESET_RF11: P11.9 U11.8 | length 78.3
  Top Layer w0.508: v1(79.715,97.504) U11.8@81.026,97.504
  Mid-Layer 1 w0.203: v1(79.715,97.504) 81.933,95.285 81.933,85.199 83.16,83.972 83.16,40.792 87.884,36.068 87.884,26.178 P11.9@86.268,24.562
RESET_RF12: P12.9 U12.8 | length 59.1
  Top Layer w0.508: v1(79.887,79.5) U12.8@81.026,79.5
  Bottom Layer w0.254: P12.9@74.942,24.562 76.632,24.562 79.887,27.817 v1(79.887,79.5)
RESET_RF13: P13.9 U13.8 | length 53.3
  Top Layer w0.508: v1(65.727,133.5) U13.8@66.802,133.5
  Mid-Layer 1 w0.254: v1(55.88,159.258) 55.88,153.162 66.994,142.048 66.994,134.766 v1(65.727,133.5)
  Bottom Layer w0.254: v1(55.88,159.258) 56.642,160.02 56.642,172.212 57.912,173.482 62.346,173.482 P13.9@63.616,174.752
RESET_RF14: P14.9 U14.8 | length 76.3
  Top Layer w0.508: v1(65.727,115.5) U14.8@66.802,115.5
  Mid-Layer 1 w0.203: v1(49.53,158.242) 47.244,160.528 47.244,172.466 48.26,173.482 51.02,173.482 P14.9@52.29,174.752
  Bottom Layer w0.203: v1(49.53,158.242) 50.8,158.242 61.722,147.32 ; 60.706,148.336 61.722,147.32 ; v1(65.727,115.5) 66.986,115.5 67.818,116.332 67.818,141.224 61.722,147.32
RESET_RF15: P15.9 U15.8 | length 78.5
  Top Layer w0.508: v1(65.727,97.5) U15.8@66.802,97.5
  Mid-Layer 1 w0.203: P15.9@63.616,24.562 65.024,25.97 65.024,56.542 68.682,60.199 68.682,84.48 67.946,85.216 67.946,87.376 ; v1(65.727,97.5) 67.946,95.281 67.946,87.376 ; 67.946,86.186 67.946,87.376
RESET_RF16: P16.9 U16.8 | length 61.6
  Top Layer w0.508: v1(65.727,79.5) U16.8@66.802,79.5
  Bottom Layer w0.254: P16.9@52.29,24.562 54.864,27.136 54.864,60.452 65.727,71.315 v1(65.727,79.5)
RESET_RF17: P17.9 U17.8 | length 53.8
  Top Layer w0.508: v1(51.567,133.5) U17.8@52.507,133.5
  Mid-Layer 1 w0.203: v1(37.592,156.21) 52.859,140.943 52.859,134.112 52.247,133.5 v1(51.567,133.5)
  Bottom Layer w0.203: v1(37.592,156.21) 35.56,158.242 35.56,171.45 37.592,173.482 39.694,173.482 P17.9@40.964,174.752
RESET_RF18: P18.9 U18.8 | length 85.3
  Top Layer w0.508: v1(51.567,115.5) U18.8@52.507,115.5
  Mid-Layer 1 w0.203: v1(28.702,157.988) 27.94,158.75 26.416,158.75 24.13,161.036 24.13,172.212 25.4,173.482 28.368,173.482 P18.9@29.638,174.752
  Bottom Layer w0.203: v1(28.702,157.988) 35.56,151.13 47.752,151.13 53.556,145.326 53.556,117.488 v1(51.567,115.5)
RESET_RF19: P19.9 U19.8 | length 81.7
  Top Layer w0.508: v1(51.775,97.504) U19.8@52.507,97.504
  Mid-Layer 1 w0.203: P19.9@40.964,24.384 43.18,26.6 43.18,46.228 54.966,58.014 54.966,83.972 53.993,84.945 53.993,86.868 ; v1(51.775,97.504) 53.993,95.285 53.993,86.868 ; 53.993,86.19 53.993,86.868
RESET_RF20: P20.9 U20.8 | length 65
  Top Layer w0.508: v1(51.567,79.5) U20.8@52.507,79.5
  Bottom Layer w0.254: P20.9@29.638,24.511 31.75,26.623 31.75,49.784 51.567,69.601 v1(51.567,79.5)
RESET_RF21: P21.9 U21.8 | length 62.3
  Top Layer w0.508: v1(37.407,133.5) U21.8@38.608,133.5
  Mid-Layer 1 w0.203: v1(16.764,158.496) 16.764,154.432 32.004,139.192 37.592,139.192 38.699,138.085 38.699,134.874 38.699,134.112 38.087,133.5 v1(37.407,133.5)
  Bottom Layer w0.203: v1(16.764,158.496) 16.764,159.766 11.938,164.592 11.938,171.704 13.716,173.482 17.042,173.482 P21.9@18.312,174.752
RESET_RF22: P22.9 U22.8 | length 96.7
  Top Layer w0.508: v1(37.407,115.5) U22.8@38.608,115.5
  Mid-Layer 1 w0.203: P22.9@6.986,174.752 5.716,173.482 3.048,173.482 1.778,172.212 1.778,147.066 7.112,141.732 v1(19.304,141.732)
  Bottom Layer w0.203: v1(19.304,141.732) 21.082,139.954 37.338,139.954 38.699,138.593 38.699,116.792 v1(37.407,115.5)
RESET_RF23: P23.9 U23.8 | length 84.8
  Top Layer w0.508: v1(37.407,97.5) U23.8@38.608,97.5
  Mid-Layer 1 w0.203: P23.9@18.312,24.562 21.336,27.586 21.336,39.37 39.626,57.66 39.626,87.122 ; v1(37.407,97.5) 39.626,95.281 39.626,87.122 ; 39.626,86.186 39.626,87.122
RESET_RF24: P24.9 U24.8 | length 68.7
  Top Layer w0.508: v1(37.407,79.5) U24.8@38.608,79.5
  Bottom Layer w0.254: P24.9@6.986,24.562 9.906,27.482 9.906,46.736 37.407,74.237 v1(37.407,79.5)
RF1: SMA1.5 U1.11 | length 9.2
  Top Layer w0.508: SMA1.5@104.09,131.547 104.09,134.26 cw(c106.63,134.26) 106.63,136.8 U1.11@109.147,136.8
RF2: SMA2.5 U2.11 | length 9.3
  Top Layer w0.508: SMA2.5@103.963,113.546 103.963,116.26 cw(c106.503,116.26) 106.503,118.8 U2.11@109.147,118.8
RF3: SMA3.5 U3.11 | length 10.4
  Top Layer w0.508: SMA3.5@103.963,94.454 103.963,98.26 cw(c106.503,98.26) 106.503,100.8 U3.11@109.147,100.8
RF4: SMA4.5 U4.11 | length 9.3
  Top Layer w0.508: SMA4.5@103.963,77.546 103.963,80.26 cw(c106.503,80.26) 106.503,82.8 U4.11@109.147,82.8
RF5: SMA5.5 U5.11 | length 9.3
  Top Layer w0.508: SMA5.5@89.892,131.547 89.892,134.26 cw(c92.432,134.26) 92.432,136.8 U5.11@94.987,136.8
RF6: SMA6.5 U6.11 | length 9.4
  Top Layer w0.508: SMA6.5@89.765,113.546 89.765,116.26 cw(c92.305,116.26) 92.305,118.8 U6.11@94.987,118.8
RF7: SMA7.5 U7.11 | length 10.5
  Top Layer w0.508: SMA7.5@89.765,94.454 89.765,98.26 cw(c92.305,98.26) 92.305,100.8 U7.11@94.987,100.8
RF8: SMA8.5 U8.11 | length 9.4
  Top Layer w0.508: SMA8.5@89.79,77.546 89.79,80.26 cw(c92.33,80.26) 92.33,82.8 U8.11@94.987,82.8
RF9: SMA9.5 U9.11 | length 9.5
  Top Layer w0.508: SMA9.5@75.693,131.547 75.693,134.26 cw(c78.233,134.26) 78.233,136.8 U9.11@81.026,136.8
RF10: SMA10.5 U10.11 | length 9.6
  Top Layer w0.508: SMA10.5@75.566,113.546 75.566,116.26 cw(c78.106,116.26) 78.106,118.8 U10.11@81.026,118.8
RF11: SMA11.5 U11.11 | length 10.7
  Top Layer w0.508: SMA11.5@75.566,94.454 75.566,98.26 cw(c78.106,98.26) 78.106,100.8 U11.11@81.026,100.8
RF12: SMA12.5 U12.11 | length 9.6
  Top Layer w0.508: SMA12.5@75.617,77.546 75.617,80.26 cw(c78.157,80.26) 78.157,82.8 U12.11@81.026,82.8
RF13: SMA13.5 U13.11 | length 9.5
  Top Layer w0.508: SMA13.5@61.494,131.547 61.494,134.26 cw(c64.034,134.26) 64.034,136.8 U13.11@66.802,136.8
RF14: SMA14.5 U14.11 | length 9.6
  Top Layer w0.508: SMA14.5@61.367,113.546 61.367,116.26 cw(c63.907,116.26) 63.907,118.8 U14.11@66.802,118.8
RF15: SMA15.5 U15.11 | length 10.7
  Top Layer w0.508: SMA15.5@61.367,94.454 61.367,98.26 cw(c63.907,98.26) 63.907,100.8 U15.11@66.802,100.8
RF16: SMA16.5 U16.11 | length 9.5
  Top Layer w0.508: SMA16.5@61.444,77.546 61.444,80.26 cw(c63.984,80.26) 63.984,82.8 U16.11@66.802,82.8
RF17: SMA17.5 U17.11 | length 9.4
  Top Layer w0.508: SMA17.5@47.296,131.547 47.296,134.26 cw(c49.836,134.26) 49.836,136.8 U17.11@52.507,136.8
RF18: SMA18.5 U18.11 | length 9.5
  Top Layer w0.508: SMA18.5@47.169,113.546 47.169,116.26 cw(c49.709,116.26) 49.709,118.8 U18.11@52.507,118.8
RF19: SMA19.5 U19.11 | length 10.6
  Top Layer w0.508: SMA19.5@47.169,94.454 47.169,98.26 cw(c49.709,98.26) 49.709,100.8 U19.11@52.507,100.8
RF20: SMA20.5 U20.11 | length 9.4
  Top Layer w0.508: SMA20.5@47.27,77.546 47.27,80.26 cw(c49.81,80.26) 49.81,82.8 U20.11@52.507,82.8
RF21: SMA21.5 U21.11 | length 9.7
  Top Layer w0.508: SMA21.5@33.097,131.547 33.097,134.26 cw(c35.637,134.26) 35.637,136.8 U21.11@38.608,136.8
RF22: SMA22.5 U22.11 | length 9.8
  Top Layer w0.508: SMA22.5@32.97,113.546 32.97,116.26 cw(c35.51,116.26) 35.51,118.8 U22.11@38.608,118.8
RF23: SMA23.5 U23.11 | length 10.9
  Top Layer w0.508: SMA23.5@32.97,94.454 32.97,98.26 cw(c35.51,98.26) 35.51,100.8 U23.11@38.608,100.8
RF24: SMA24.5 U24.11 | length 9.8
  Top Layer w0.508: SMA24.5@32.97,77.546 32.97,80.26 cw(c35.51,80.26) 35.51,82.8 U24.11@38.608,82.8
RXD0_RF1: P1.5 U1.21 | length 85.3
  Top Layer w0.508: U1.21@98.207,127.18 v1(99.146,127.18)
  Mid-Layer 1 w0.203: v1(99.146,127.18) 99.146,126.942 98.536,126.332 98.536,123.627 98.893,123.27 108.538,123.27 111.252,125.984 111.252,145.034 125.984,159.766 125.984,179.832 127.254,181.102 130.302,181.102 P1.5@131.572,179.832
RXD0_RF2: P2.5 U2.21 | length 98.7
  Top Layer w0.508: U2.21@98.207,109.18 v1(99.146,109.18)
  Bottom Layer w0.203: v1(99.146,109.18) 98.536,108.57 98.536,105.627 98.893,105.27 99.568,105.27 100.724,106.426 109.694,106.426 111.252,107.984 111.252,162.306 114.046,165.1 114.046,179.324 115.824,181.102 118.976,181.102 P2.5@120.246,179.832
RXD0_RF3: P3.5 U3.21 | length 96.3
  Top Layer w0.508: U3.21@98.207,91.18 v1(99.146,91.18)
  Mid-Layer 1 w0.203: v1(99.146,91.18) 97.841,89.875 97.841,87.676 98.903,86.614 126.492,86.614 130.048,83.058 130.048,40.64 127.508,38.1 127.508,31.75 128.016,31.242 130.175,31.242 P3.5@131.572,29.845
RXD0_RF4: P4.5 U4.21 | length 62.3
  Top Layer w0.508: U4.21@98.207,73.18 v1(99.146,73.18)
  Bottom Layer w0.203: v1(99.146,73.18) 98.079,72.113 98.079,69.053 98.806,68.326 109.728,68.326 110.998,67.056 110.998,51.308 114.808,47.498 114.808,32.004 115.824,30.988 118.9,30.988 P4.5@120.246,29.642
RXD0_RF5: P5.5 U5.21 | length 82.2
  Top Layer w0.508: U5.21@83.82,127.18 v1(84.986,127.18)
  Mid-Layer 1 w0.203: v1(84.986,127.18) 84.376,126.57 84.376,123.627 84.733,123.27 94.378,123.27 97.092,125.984 97.092,148.654 102.616,154.178 102.616,179.324 104.394,181.102 107.65,181.102 P5.5@108.92,179.832
RXD0_RF6: P6.5 U6.21 | length 100.8
  Top Layer w0.508: U6.21@83.82,109.18 v1(84.986,109.18)
  Bottom Layer w0.203: v1(84.986,109.18) 84.376,108.57 84.376,105.627 84.733,105.27 92.699,105.27 97.841,110.412 97.841,147.777 90.678,154.94 90.678,179.324 92.456,181.102 96.324,181.102 P6.5@97.594,179.832
RXD0_RF7: P7.5 U7.21 | length 79.1
  Top Layer w0.508: U7.21@83.82,91.18 v1(84.986,91.18)
  Mid-Layer 1 w0.203: v1(84.986,91.18) 83.871,90.065 83.871,87.187 84.697,86.36 92.202,86.36 96.012,82.55 96.012,61.722 104.902,52.832 104.902,31.75 105.664,30.988 107.574,30.988 P7.5@108.92,29.642
RXD0_RF8: P8.5 U8.21 | length 56.9
  Top Layer w0.508: U8.21@83.82,73.18 v1(84.986,73.18)
  Bottom Layer w0.254: v1(84.986,73.18) 83.566,71.76 83.566,69.088 84.074,68.58 90.678,68.58 92.456,66.802 92.456,31.496 92.964,30.988 96.248,30.988 P8.5@97.594,29.642
RXD0_RF9: P9.5 U9.21 | length 82.3
  Top Layer w0.508: U9.21@69.596,127.18 v1(70.826,127.18)
  Mid-Layer 1 w0.203: v1(70.826,127.18) 70.216,126.57 70.216,123.627 70.573,123.27 80.218,123.27 82.932,125.984 82.932,149.986 79.502,153.416 79.502,180.086 80.518,181.102 84.998,181.102 P9.5@86.268,179.832
RXD0_RF10: P10.5 U10.21 | length 104.1
  Top Layer w0.508: U10.21@69.596,109.18 v1(70.826,109.18)
  Bottom Layer w0.203: v1(70.826,109.18) 70.216,108.57 70.216,105.627 70.573,105.27 80.218,105.27 82.932,107.984 82.932,149.732 68.428,164.236 68.428,179.172 70.358,181.102 73.672,181.102 P10.5@74.942,179.832
RXD0_RF11: P11.5 U11.21 | length 75.9
  Top Layer w0.508: U11.21@69.596,91.184 v1(70.653,91.184)
  Mid-Layer 1 w0.203: v1(70.653,91.184) 69.538,90.069 69.538,87.191 70.365,86.364 77.869,86.364 81.28,82.954 81.28,32.004 82.296,30.988 84.922,30.988 P11.5@86.268,29.642
RXD0_RF12: P12.5 U12.21 | length 51.7
  Top Layer w0.508: U12.21@69.596,73.18 v1(70.826,73.18)
  Bottom Layer w0.254: v1(70.826,73.18) 69.406,71.76 69.406,69.088 72.898,65.596 72.898,45.974 70.104,43.18 70.104,31.496 70.612,30.988 73.596,30.988 P12.5@74.942,29.642
RXD0_RF13: P13.5 U13.21 | length 83.1
  Top Layer w0.508: U13.21@55.727,127.18 v1(56.666,127.18)
  Mid-Layer 1 w0.203: v1(56.666,127.18) 56.056,126.57 56.056,123.627 56.413,123.27 66.058,123.27 68.772,125.984 68.772,143.318 58.42,153.67 58.42,180.086 59.283,180.949 62.498,180.949 P13.5@63.616,179.832
RXD0_RF14: P14.5 U14.21 | length 107.3
  Top Layer w0.508: U14.21@55.727,109.18 v1(56.666,109.18)
  Bottom Layer w0.203: P14.5@52.29,179.832 51.02,181.102 47.498,181.102 45.504,179.108 45.504,166.342 69.596,142.25 69.596,110.744 65.024,106.172 59.944,106.172 58.928,105.156 56.527,105.156 56.056,105.627 56.056,108.57 v1(56.666,109.18)
RXD0_RF15: P15.5 U15.21 | length 83.4
  Top Layer w0.508: U15.21@55.727,91.18 v1(56.666,91.18)
  Mid-Layer 1 w0.203: v1(56.666,91.18) 55.551,90.065 55.551,87.187 56.377,86.36 63.882,86.36 67.005,83.237 67.005,61.533 55.88,50.407 55.88,31.381 56.273,30.988 62.27,30.988 P15.5@63.616,29.642
RXD0_RF16: P16.5 U16.21 | length 52.2
  Top Layer w0.508: U16.21@55.727,73.18 v1(56.666,73.18)
  Bottom Layer w0.254: P16.5@52.29,29.642 50.944,30.988 48.006,30.988 47.244,31.75 47.244,60.198 55.246,68.2 55.246,71.76 v1(56.666,73.18)
RXD0_RF17: P17.5 U17.21 | length 87.6
  Top Layer w0.508: U17.21@41.567,127.18 v1(42.506,127.18)
  Mid-Layer 1 w0.203: P17.5@40.964,179.832 39.694,181.102 36.322,181.102 35.052,179.832 35.052,162.052 54.612,142.492 54.612,125.984 51.898,123.27 42.253,123.27 41.896,123.627 41.896,126.57 v1(42.506,127.18)
RXD0_RF18: P18.5 U18.21 | length 116.8
  Top Layer w0.508: U18.21@41.567,109.18 v1(42.506,109.18)
  Bottom Layer w0.203: P18.5@29.638,179.832 28.368,181.102 26.416,181.102 23.368,178.054 23.368,166.878 36.576,153.67 49.276,153.67 55.372,147.574 55.372,110.494 50.148,105.27 42.253,105.27 41.896,105.627 41.896,108.57 v1(42.506,109.18)
RXD0_RF19: P19.5 U19.21 | length 87
  Top Layer w0.508: U19.21@41.567,91.184 v1(42.713,91.184)
  Mid-Layer 1 w0.203: P19.5@40.964,29.464 39.694,30.734 34.036,30.734 33.274,31.496 33.274,43.688 52.832,63.246 52.832,83.462 49.929,86.364 42.425,86.364 41.598,87.191 41.598,90.069 v1(42.713,91.184)
RXD0_RF20: P20.5 U20.21 | length 55.7
  Top Layer w0.508: U20.21@41.567,73.18 v1(42.506,73.18)
  Bottom Layer w0.254: P20.5@29.638,29.591 28.241,30.988 25.4,30.988 24.638,31.75 24.638,49.356 41.086,65.804 41.086,71.76 v1(42.506,73.18)
RXD0_RF21: P21.5 U21.21 | length 93.1
  Top Layer w0.508: U21.21@27.407,127.18 v1(28.346,127.18)
  Mid-Layer 1 w0.203: P21.5@18.312,179.832 17.042,181.102 13.97,181.102 12.7,179.832 12.7,167.386 16.916,163.17 33.528,146.558 36.83,146.558 40.452,142.936 40.452,125.984 37.738,123.27 28.093,123.27 27.498,123.865 27.498,126.746 27.932,127.18 v1(28.346,127.18)
RXD0_RF22: P22.5 U22.21 | length 130.5
  Top Layer w0.508: U22.21@27.407,109.18 v1(28.346,109.18)
  Bottom Layer w0.203: P22.5@6.986,179.832 5.716,181.102 3.048,181.102 2.032,180.086 2.032,149.86 6.017,145.875 38.341,145.875 40.452,143.764 40.452,110.556 36.33,106.434 30.881,106.434 29.718,105.27 28.093,105.27 27.498,105.865 27.498,108.746 27.932,109.18 v1(28.346,109.18)
RXD0_RF23: P23.5 U23.21 | length 75.7
  Top Layer w0.508: U23.21@27.407,91.18 v1(28.346,91.18)
  Mid-Layer 1 w0.203: P23.5@18.312,29.642 17.353,29.642 16.235,30.759 13.183,30.759 11.938,32.004 11.938,38.608 24.13,50.8 24.13,89.408 25.902,91.18 v1(28.346,91.18)
RXD0_RF24: P24.5 U24.21 | length 63.7
  Top Layer w0.508: U24.21@27.407,73.18 v1(28.346,73.18)
  Bottom Layer w0.254: P24.5@6.986,29.642 5.64,30.988 3.782,30.988 2.286,32.484 2.286,53.848 8.128,59.69 17.272,59.69 26.926,69.344 26.926,71.76 v1(28.346,73.18)
TXD0_RF1: P1.6 U1.20 | length 83.3
  Top Layer w0.508: U1.20@98.207,128.28 v1(99.146,128.28)
  Mid-Layer 1 w0.203: v1(99.146,128.28) 98.079,127.213 98.079,123.438 98.704,122.813 108.727,122.813 111.709,125.795 111.709,144.221 126.746,159.258 126.746,178.816 127.762,179.832 P1.6@129.032,179.832
TXD0_RF2: P2.6 U2.20 | length 96.8
  Top Layer w0.508: U2.20@98.207,110.28 v1(99.146,110.28)
  Bottom Layer w0.203: v1(99.146,110.28) 98.079,109.213 98.079,105.438 98.704,104.813 99.757,104.813 100.894,105.95 101.6,105.95 109.864,105.95 111.709,107.795 111.709,161.747 114.808,164.846 114.808,178.562 116.078,179.832 P2.6@117.706,179.832
TXD0_RF3: P3.6 U3.20 | length 96.3
  Top Layer w0.508: U3.20@98.207,92.28 v1(99.146,92.28)
  Mid-Layer 1 w0.203: v1(99.146,92.28) 97.384,90.517 97.384,87.274 98.552,86.106 125.984,86.106 129.54,82.55 129.54,41.656 126.746,38.862 126.746,30.988 127.889,29.845 P3.6@129.032,29.845
TXD0_RF4: P4.6 U4.20 | length 61.5
  Top Layer w0.508: U4.20@98.207,74.28 v1(99.146,74.28)
  Bottom Layer w0.203: v1(99.146,74.28) 97.536,72.67 97.536,68.834 98.552,67.818 108.458,67.818 110.236,66.04 110.236,50.546 114.046,46.736 114.046,31.496 115.9,29.642 P4.6@117.706,29.642
TXD0_RF5: P5.6 U5.20 | length 80.1
  Top Layer w0.508: U5.20@83.82,128.28 v1(84.986,128.28)
  Mid-Layer 1 w0.203: v1(84.986,128.28) 83.919,127.213 83.919,123.438 84.544,122.813 94.567,122.813 97.549,125.795 97.549,148.095 103.124,153.67 103.124,178.054 104.902,179.832 P5.6@106.38,179.832
TXD0_RF6: P6.6 U6.20 | length 98.8
  Top Layer w0.508: U6.20@83.82,110.28 v1(84.986,110.28)
  Bottom Layer w0.203: v1(84.986,110.28) 83.919,109.213 83.919,105.438 84.544,104.813 92.888,104.813 98.298,110.223 98.298,148.336 91.44,155.194 91.44,178.816 92.456,179.832 P6.6@95.054,179.832
TXD0_RF7: P7.6 U7.20 | length 78.4
  Top Layer w0.508: U7.20@83.82,92.28 v1(84.986,92.28)
  Mid-Layer 1 w0.203: v1(84.986,92.28) 83.312,90.606 83.312,86.868 84.328,85.852 91.694,85.852 95.555,81.991 95.555,61.163 104.445,52.273 104.445,31.561 106.364,29.642 P7.6@106.38,29.642
TXD0_RF8: P8.6 U8.20 | length 56.6
  Top Layer w0.508: U8.20@83.82,74.28 v1(84.986,74.28)
  Bottom Layer w0.203: v1(84.986,74.28) 83.058,72.352 83.058,68.58 83.566,68.072 89.916,68.072 91.694,66.294 91.694,30.734 92.786,29.642 P8.6@95.054,29.642
TXD0_RF9: P9.6 U9.20 | length 79.9
  Top Layer w0.508: U9.20@69.596,128.28 v1(70.826,128.28)
  Mid-Layer 1 w0.203: v1(70.826,128.28) 69.759,127.213 69.759,123.438 70.384,122.813 80.407,122.813 83.389,125.795 83.389,150.545 80.01,153.924 80.01,178.308 81.534,179.832 P9.6@83.728,179.832
TXD0_RF10: P10.6 U10.20 | length 101.9
  Top Layer w0.508: U10.20@69.596,110.28 v1(70.826,110.28)
  Bottom Layer w0.203: v1(70.826,110.28) 69.759,109.213 69.759,105.438 70.384,104.813 80.407,104.813 83.389,107.795 83.389,150.037 68.885,164.541 68.885,177.597 71.12,179.832 P10.6@72.402,179.832
TXD0_RF11: P11.6 U11.20 | length 75.8
  Top Layer w0.508: U11.20@69.596,92.284 v1(70.653,92.284)
  Mid-Layer 1 w0.203: v1(70.653,92.284) 68.979,90.61 68.979,86.872 69.995,85.856 70.358,85.856 77.361,85.856 80.772,82.446 80.772,30.988 82.118,29.642 P11.6@83.728,29.642
TXD0_RF12: P12.6 U12.20 | length 50.9
  Top Layer w0.508: U12.20@69.596,74.28 v1(70.826,74.28)
  Bottom Layer w0.203: v1(70.826,74.28) 68.898,72.352 68.898,68.58 71.152,66.326 71.152,46.26 69.342,44.45 69.342,30.48 70.18,29.642 P12.6@72.402,29.642
TXD0_RF13: P13.6 U13.20 | length 80.3
  Top Layer w0.508: U13.20@55.727,128.28 v1(56.666,128.28)
  Mid-Layer 1 w0.203: v1(56.666,128.28) 55.599,127.213 55.599,123.438 56.224,122.813 66.247,122.813 69.229,125.795 69.229,144.131 59.182,154.178 59.182,177.938 P13.6@61.076,179.832
TXD0_RF14: P14.6 U14.20 | length 108.5
  Top Layer w0.508: U14.20@55.727,110.28 v1(56.666,110.28)
  Bottom Layer w0.203: P14.6@49.75,179.832 47.752,179.832 46.228,178.308 46.228,166.37 70.104,142.494 70.104,110.204 63.754,103.854 63.754,102.87 62.822,101.938 58.844,101.938 55.599,105.183 55.599,105.411 55.599,109.213 v1(56.666,110.28)
TXD0_RF15: P15.6 U15.20 | length 82.5
  Top Layer w0.508: U15.20@55.727,92.28 v1(56.666,92.28)
  Mid-Layer 1 w0.203: v1(56.666,92.28) 54.992,90.606 54.992,86.868 56.77,85.09 63.754,85.09 65.786,83.058 66.548,82.296 66.548,61.722 55.372,50.546 55.372,31.242 56.972,29.642 P15.6@61.076,29.642
TXD0_RF16: P16.6 U16.20 | length 52.2
  Top Layer w0.508: U16.20@55.727,74.28 v1(56.666,74.28)
  Bottom Layer w0.203: P16.6@49.75,29.642 47.574,29.642 46.736,30.48 46.736,60.578 54.763,68.605 54.763,72.377 v1(56.666,74.28)
TXD0_RF17: P17.6 U17.20 | length 85.2
  Top Layer w0.508: U17.20@41.567,128.28 v1(42.506,128.28)
  Mid-Layer 1 w0.203: P17.6@38.424,179.832 37.084,179.832 35.814,178.562 35.814,162.306 55.069,143.051 55.069,125.795 52.087,122.813 42.064,122.813 41.925,122.951 41.439,123.438 41.439,127.213 v1(42.506,128.28)
TXD0_RF18: P18.6 U18.20 | length 114.8
  Top Layer w0.508: U18.20@41.567,110.28 v1(42.506,110.28)
  Bottom Layer w0.203: P18.6@27.098,179.832 24.13,176.864 24.13,166.763 36.765,154.127 49.835,154.127 55.947,148.015 55.947,110.423 50.337,104.813 42.064,104.813 41.439,105.438 41.439,109.213 v1(42.506,110.28)
TXD0_RF19: P19.6 U19.20 | length 86
  Top Layer w0.508: U19.20@41.567,92.284 v1(42.713,92.284)
  Mid-Layer 1 w0.203: P19.6@38.424,29.464 34.29,29.464 32.766,30.988 32.766,44.196 52.324,63.754 52.324,82.042 51.642,82.724 49.864,82.724 47.244,85.344 42.568,85.344 41.039,86.872 41.039,90.61 v1(42.713,92.284)
TXD0_RF20: P20.6 U20.20 | length 56
  Top Layer w0.508: U20.20@41.567,74.28 v1(42.506,74.28)
  Bottom Layer w0.203: P20.6@27.098,29.591 24.765,29.591 23.876,30.48 23.876,49.276 40.578,65.978 40.578,72.352 v1(42.506,74.28)